# Altium PCB SWITCH_PCB.PcbDoc
Units mm, origin at the board's own origin, x right, y up, seen from the top; angles counter-clockwise.
Board outline 30 x 17 mm, 2 copper layers (Top Layer, Bottom Layer), stack 1.071 mm thick; 37 components, 26 nets, 78 pads, 46 vias.
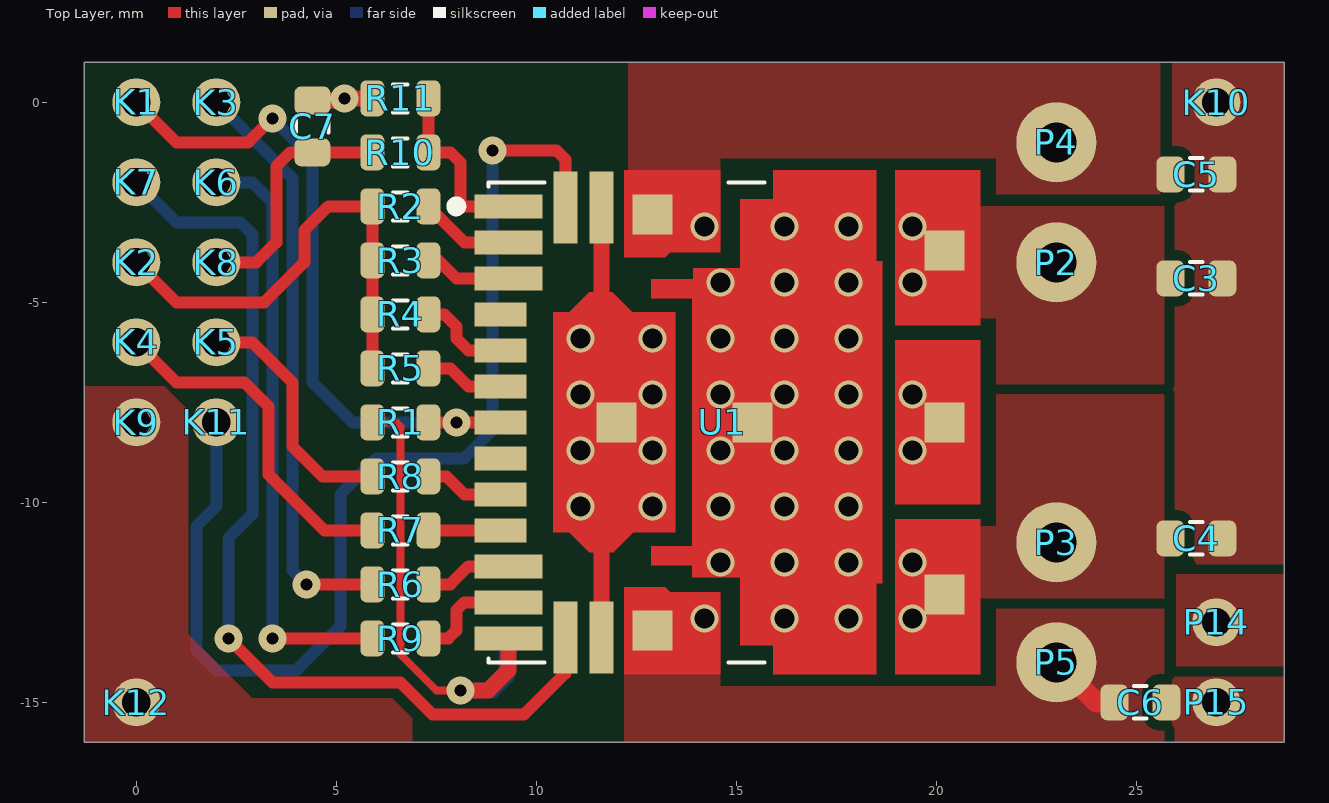
[diagram p0: Top Layer view]
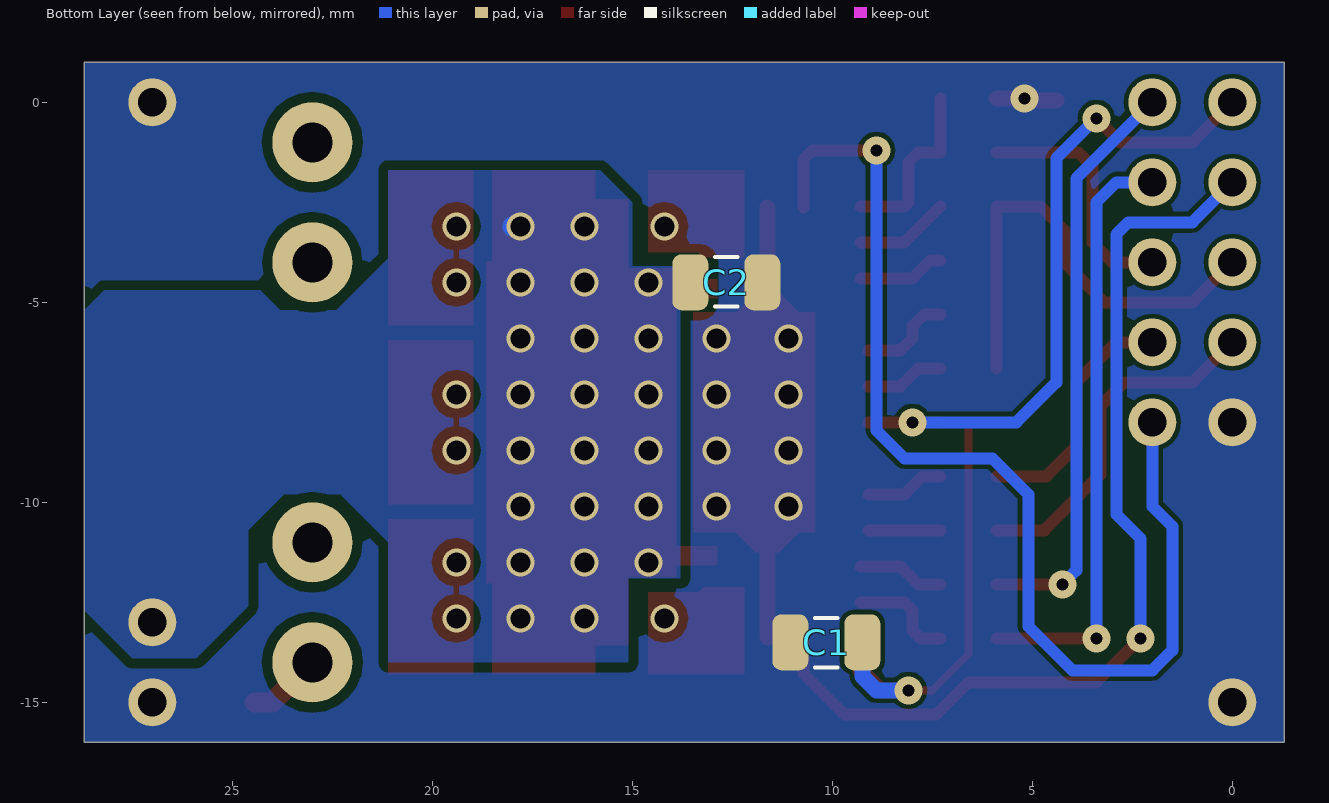
[diagram p1: Bottom Layer view, seen from below]
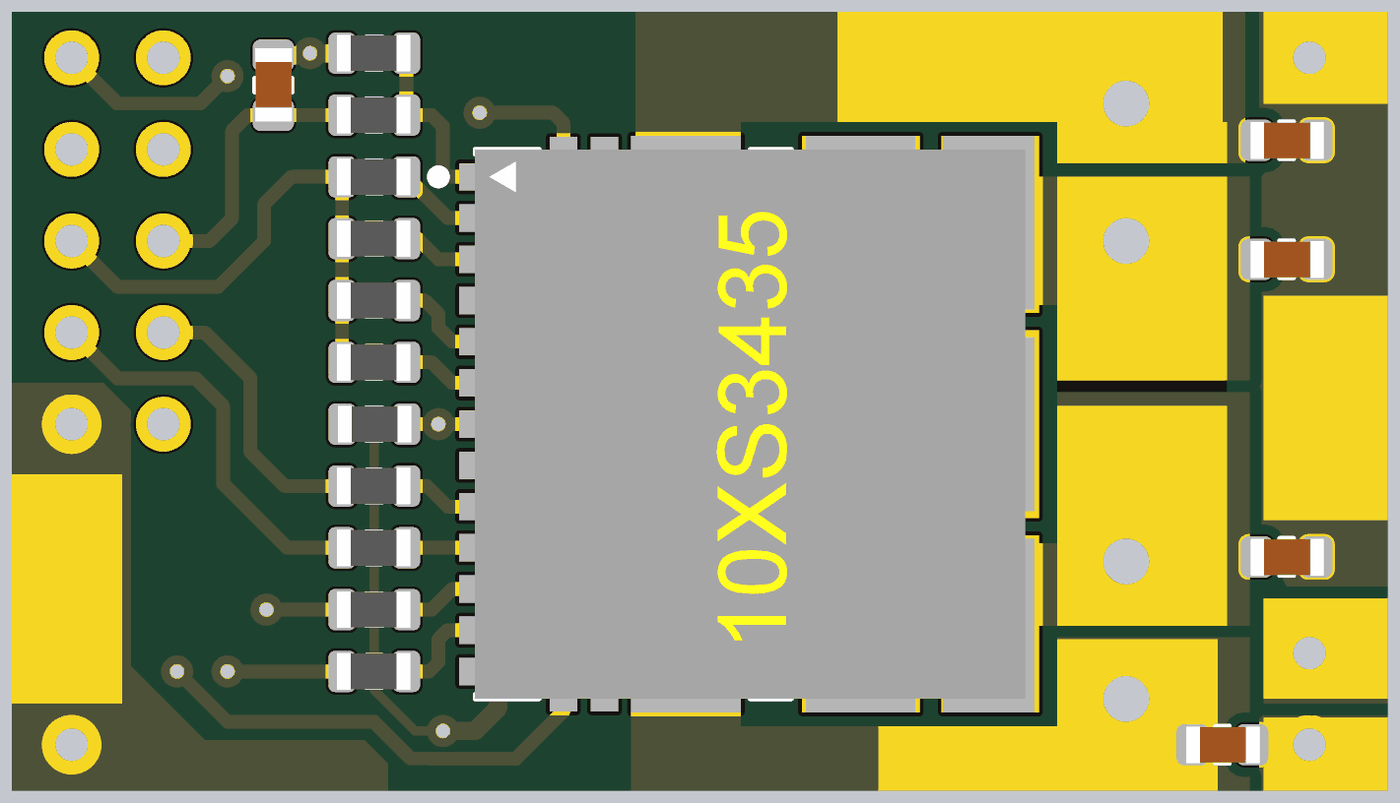
[diagram p2: 3D render of the assembled board from above, using the file's embedded part models]

## Layer stack, top to bottom
Top Solder: solder mask 0.0102, Solder Resist, Dk 3.5
Top Layer: signal copper 0.0356
Dielectric 1: dielectric 1, FR-4, Dk 4.8
Bottom Layer: signal copper 0.0356
Bottom Solder: solder mask 0.0102, Solder Resist, Dk 3.5

## Board outline
-1.3,-16 28.7,-16 28.7,1 -1.3,1

## Design rules (kind name [scope] priority, off if disabled: settings)
Clearance NET24V [All vs InNetClass('24V')] p1: gap=0.25
Clearance Poly [(InNamedPolygon('BOT_GND') OR InNamedPolygon('TOP_GND'))] p2: gap=0.2
Clearance [All] p3: gap=0.11
ComponentClearance [All] p1: gap=0.254 collisioncheckmode=3 verticalgap=0 showdistances=FALSE
HoleSize [All] p1: absolutevalues=TRUE maxlimit=3 minlimit=0.15 maxpercent=80.000 minpercent=20.000
HoleToHoleClearance [All] p1: gap=0.1 allowstackedmicrovias=TRUE
MinimumSolderMaskSliver [All] p1: minsoldermaskwidth=0
PolygonConnect [All] p1: connectstyle=Direct reliefconductorwidth=0.254 reliefentries=4 polygonreliefangle="90 Angle" airgapwidth=0.254
RoutingVias [All] p1: holewidth=0.15 width=0.4 viastyle="Through Hole" minholewidth=0.2 minwidth=0.5 maxholewidth=3 maxwidth=5
SilkToSilkClearance [All] p1: silktosilkclearance=0
SilkToSolderMaskClearance [IsPad] p1: minsilkscreentomaskgap=0 clearancetoexposedcopper=TRUE
SolderMaskExpansion [All] p1: expansion=0.05
Width [All] p1: maxlimit=5 minlimit=0.2 preferedwidth=0.2
23 further rules are at their usual default settings.

## Classes and differential pairs
net class 24V: HS0 HS1 HS2 HS3 VPWR

## Components (designator, comment, footprint, x,y, rotation, side; value= is the part's Value field where it differs from the comment)
C1 "C0805C224K5RACTU" 2012[0805] 10.1,-13.5 r180 bottom
C2 "C0805C224K5RACTU" 2012[0805] 12.7,-4.5 r0 bottom
C3 "CL10B223KB8NNNC" 1608[0603] 26.5,-4.4 r0 top
C4 "CL10B223KB8NNNC" 1608[0603] 26.5,-10.9 r0 top
C5 "CL10B223KB8NNNC" 1608[0603] 26.5,-1.8 r0 top
C6 "CL10B223KB8NNNC" 1608[0603] 25.1,-15 r0 top
C7 "CL10B223KB8NNNC" 1608[0603] 4.4,-0.6 r90 top
K1 "Pin 0.7 mm" "Mount hole 0.7 mm"#1 0,0 r0 top net-tie
K2 "Pin 0.7 mm" "Mount hole 0.7 mm"#1 0,-4 r0 top net-tie
K3 "Pin 0.7 mm" "Mount hole 0.7 mm"#1 2,0 r0 top net-tie
K4 "Pin 0.7 mm" "Mount hole 0.7 mm"#1 0,-6 r0 top net-tie
K5 "Pin 0.7 mm" "Mount hole 0.7 mm"#1 2,-6 r0 top net-tie
K6 "Pin 0.7 mm" "Mount hole 0.7 mm"#1 2,-2 r0 top net-tie
K7 "Pin 0.7 mm" "Mount hole 0.7 mm"#1 0,-2 r0 top net-tie
K8 "Pin 0.7 mm" "Mount hole 0.7 mm"#1 2,-4 r0 top net-tie
K9 "Pin 0.7 mm" "Mount hole 0.7 mm"#1 0,-8 r0 top net-tie
K10 "Pin 0.7 mm" "Mount hole 0.7 mm"#1 27,0 r180 top net-tie
K11 "Pin 0.7 mm" "Mount hole 0.7 mm"#1 2,-8 r0 top net-tie
K12 "Pin 0.7 mm" "Mount hole 0.7 mm"#1 0,-15 r0 top net-tie (schematic designator K9)
P2 "Pin 0.7 mm" "Mount hole 0.7 mm"#2 23,-4 r0 top net-tie
P3 "Pin 0.7 mm" "Mount hole 0.7 mm"#2 23,-11 r0 top net-tie
P4 "Pin 0.7 mm" "Mount hole 0.7 mm"#2 23,-1 r0 top net-tie
P5 "Pin 0.7 mm" "Mount hole 0.7 mm"#2 23,-14 r0 top net-tie
P14 "Pin 0.7 mm" "Mount hole 0.7 mm"#1 27,-13 r180 top net-tie
P15 "Pin 0.7 mm" "Mount hole 0.7 mm"#1 27,-15 r180 top net-tie
R1 "ERJ-3EKF1002V" 0603 6.6,-8 r0 top
R2 "ERJ-3EKF1002V" 0603 6.6,-2.6 r180 top
R3 "ERJ-3EKF1002V" 0603 6.6,-3.95 r180 top
R4 "ERJ-3EKF1002V" 0603 6.6,-5.3 r180 top
R5 "ERJ-3EKF1002V" 0603 6.6,-6.65 r180 top
R6 "ERJ-3EKF1002V" 0603 6.6,-12.05 r180 top
R7 "ERJ-3EKF1002V" 0603 6.6,-10.7 r180 top
R8 "ERJ-3EKF1002V" 0603 6.6,-9.35 r180 top
R9 "ERJ-3EKF1002V" 0603 6.6,-13.4 r180 top
R10 "ERJ-3EKF1002V" 0603 6.6,-1.25 r180 top
R11 "RC0603FR-072K2L" 0603 6.6,0.1 r180 top
U1 "MC10XS3435" "24-PIN PQFN (12*12)" 9.3,-2.6 r90 top

## Footprints (in the part's own frame and the unit in brackets; to place one, negate y for a bottom-side part, rotate by r counter-clockwise, add the part's x,y. Pads: shape width x height; smd on the part's side, far side on the other; paste and mask are expansions set on the pad)
"24-PIN PQFN (12*12)" [mm]
  rect 0.6x1.7 smd mask+0.08: 1(0,0) 2(-0.9,0) 3(-1.8,0) 11(-9,0) 12(-9.9,0) 13(-10.8,0)
  rect 0.6x1.3 smd mask+0.08: 4(-2.7,0.2) 5(-3.6,0.2) 6(-4.5,0.2) 7(-5.4,0.2) 8(-6.3,0.2) 9(-7.2,0.2) 10(-8.1,0.2)
  rect 1x1 smd: 14(-5.4,-2.7) 15(-5.4,-6.1) 18(-10.6,-3.6) 19(-9.7,-10.9) 20(-5.4,-10.9) 21(-1.1,-10.9) 22(-0.2,-3.6)
  rect 1.8x0.6 smd mask+0.08: 16(-10.775,-1.425) 17(-10.775,-2.325) 23(-0.025,-2.325) 24(-0.025,-1.425)
  Top Layer region: -11.7,-6.625 -10.975,-6.625 -10.975,-5.8 -9.275,-5.8 -9.275,-4.6 -8.975,-4.6 -8.975,-3.575 -8.5,-3.575 -8.5,-4.6 -2.3,-4.6 -2.3,-3.575 -1.825,-3.575 -1.825,-4.625 -1.55,-4.625 -1.55,-5.8 0.175,-5.8 0.175,-6.625 0.9,-6.625 0.9,-9.2 -1.375,-9.2 -1.375,-9.35 -9.425,-9.35 -9.425,-9.2 -11.7,-9.2
  Top Layer region: -9.525,-2.9 -9.525,-3.925 -9.65,-4.05 -9.65,-5.3 -11.7,-5.3 -11.7,-2.9
  Top Layer region: -8.15,-1.125 -2.65,-1.125 -2.65,-1.525 -2.15,-2.025 -2.15,-2.6 -2.65,-3.1 -2.65,-4.175 -8.15,-4.175 -8.15,-3.125 -8.65,-2.625 -8.65,-2.025 -8.15,-1.525
  Top Layer region: -1.275,-2.9 -1.275,-3.925 -1.15,-4.05 -1.15,-5.3 0.9,-5.3 0.9,-2.9
  Top Layer region: -11.7,-9.675 -11.7,-11.8 -7.825,-11.8 -7.825,-9.675
  Top Layer region: -2.975,-9.675 -2.975,-11.8 0.9,-11.8 0.9,-9.675
  Top Layer region: -7.45,-9.675 -7.45,-11.8 -3.35,-11.8 -3.35,-9.675
  silkscreen extent -11.4,-6.4 0.6,1.42, body extent -11.4,-11.5 0.6,0.5, height 2.25
0603 [mm] "Chip Resistor; Body 1.6 x 0.8 mm (LxW typ)"
  rrect50% 0.6x0.9 smd mask+0.06: 1(-0.7,0) 2(0.7,0)
  silkscreen extent -0.18,-0.35 0.18,0.35, body extent -0.79,-0.4 0.81,0.4, height 0.45
1608[0603] [mm] "Chip Capacitor; Body 1.6 x 0.8 mm (LxW typ)"
  rrect50% 0.7x0.9 smd mask+0.05: 1(-0.65,0) 2(0.65,0)
  silkscreen extent -0.15,-0.41 0.15,0.41, body extent -0.79,-0.41 0.81,0.39, height 0.8
2012[0805] [mm] "Chip Capacitor; Body 2.0 x 1.2 mm (LxW typ)"
  rrect50% 0.9x1.4 smd mask+0.07: 1(-0.95,0) 2(0.85,0)
  silkscreen extent -0.33,-0.64 0.23,0.61, body extent -1.05,-0.64 0.95,0.61, height 1.25
"Mount hole 0.7 mm"#1 [mm]
  round 1.2 hole 0.71: 1(0,0)
"Mount hole 0.7 mm"#2 [mm]
  round 2 hole 1: 1(0,0)

## Part data
C1 C2: "0.22 uF, 50V, X7R,  0805"
C3 C4 C5 C6 C7: "22 nF, 50V, 10%, X7R, 0603 SMD MLC Capacitor"
R1 R2 R3 R4 R5 R6 R7 R8 R9 R10: library part RL0603K010-1_1, "10 K, 1%, 0603, SMD Resistor, Taped"
R11: library part RL0603K002.2-1_1, "2.2 K, 1%, 0603, SMD Resistor, Taped"
U1: "Quad High-side Switch, -40..+125C, 24 PQFN"

## Via types
v1: diameter 0.7/0.7 (per signal layer), hole 0.5, Top Layer to Bottom Layer, tented both sides, 38 vias
v2: diameter 0.7/0.7 (per signal layer), hole 0.3, Top Layer to Bottom Layer, tented both sides, 8 vias

## Nets (pads, with @x,y where several pads share a name; then routed paths per layer and width w, separated by ;. In a path a pad name is that pad's centre, name@x,y a point inside that pad or via, vN(x,y) a via of type N, cw(c..) or ccw(c..) an arc to the next point about the centre after c; other vN are vias at no path point)
+5V: C1.2 R1.1 U1.13 | length 12.7
  Top Layer w0.2: R1.1 6.5,-8 6.6,-8.1 6.6,-13.8 7.5,-14.7 v2(8.1,-14.7)
  Top Layer w0.4: v2(8.1,-14.7) 8.8,-14.7 9.3,-14.2 U1.13
  Bottom Layer w0.4: v2(8.1,-14.7) 8.9,-14.7 9.25,-14.35 C1.2
FAILS: K1.1 R1.2 U1.7 | length 16.9
  Top Layer w0.3: K1.1 1,-1 2.8,-1 v2(3.4,-0.4) ; R1.2 U1.7
  Bottom Layer w0.3: v2(3.4,-0.4) 4.4,-1.4 4.4,-7 5.4,-8 v2(8,-8)
GND: C1.1 C2.1 C3.2 C4.2 C5.2 C6.2 C7.2 K9.1 K10.1 K12.1 P15.1 R11.2 U1.14 U1.17 U1.23 | length 8.5
  Top Layer w0.4: C7.2 5.15,0.05 v2(5.2,0.1) R11.2 ; v1(11.1,-10.1) 11.625,-10.625 U1.17 ; v1(11.1,-5.9) 11.625,-5.375 U1.23
  other v1: 12.9,-10.1 11.1,-8.7 12.9,-8.7 11.1,-7.3 12.9,-7.3 12.9,-5.9
HS0: C3.1 P2.1 U1.21
  other v1: 19.4,-4.5 19.4,-3.1
HS1: C4.1 P3.1 U1.19 | length 0.8
  Top Layer w0.5: P3.1@22.462,-11 P3.1@23,-10.462
  other v1: 19.4,-12.9 19.4,-11.5
HS2: C5.1 P4.1 U1.22
  other v1: 14.2,-3.1
HS3: C6.1 P5.1 U1.18 | length 1.9
  Top Layer w0.5: P5.1 24,-15 C6.1
  other v1: 14.2,-12.9
MON: C7.1 K8.1 R10.2 | length 6.2
  Top Layer w0.3: K8.1 3,-4 3.5,-3.5 3.5,-1.6 3.85,-1.25 C7.1 R10.2
NetK11_1: K11.1 U1.24 | length 28.1
  Top Layer w0.3: v2(8.9,-1.2) 10.5,-1.2 10.725,-1.425 U1.24
  Bottom Layer w0.3: K11.1 2,-10.1 1.5,-10.6 1.5,-13.7 2,-14.2 4,-14.2 5.1,-13.1 5.1,-9.8 6,-8.9 8.2,-8.9 8.9,-8.2 v2(8.9,-1.2)
NetR2_1: R2.1 U1.2 | length 2.4
  Top Layer w0.3: R2.1 8.2,-3.5 U1.2
NetR3_1: R3.1 U1.3 | length 2.2
  Top Layer w0.3: R3.1 7.55,-3.95 8,-4.4 U1.3
NetR4_1: R4.1 U1.5 | length 2.3
  Top Layer w0.3: R4.1 7.7,-5.3 8,-5.6 8,-5.9 8.3,-6.2 U1.5
NetR5_1: R5.1 U1.6 | length 2
  Top Layer w0.3: R5.1 7.85,-6.65 8.3,-7.1 U1.6
NetR6_1: R6.1 U1.11 | length 2.2
  Top Layer w0.3: R6.1 7.85,-12.05 8.3,-11.6 U1.11
NetR7_1: R7.1 U1.10 | length 1.8
  Top Layer w0.3: R7.1 U1.10
NetR8_1: R8.1 U1.9 | length 2
  Top Layer w0.3: R8.1 7.75,-9.35 8.2,-9.8 U1.9
NetR9_1: R9.1 U1.12 | length 2.7
  Top Layer w0.3: R9.1 7.8,-13.4 8,-13.2 8,-12.7 8.2,-12.5 U1.12
NetR10_1: R10.1 R11.1 U1.1 | length 4.5
  Top Layer w0.3: R11.1 R10.1 7.85,-1.25 8.1,-1.5 8.1,-2.5 8.2,-2.6 U1.1
NewNet1: U1.20
  other v1: 19.4,-8.7 19.4,-7.3
PWM: K2.1 R2.2 R3.2 R4.2 R5.2 | length 11.8
  Top Layer w0.3: K2.1 1,-5 3.2,-5 4.2,-4 4.2,-3.2 4.8,-2.6 R2.2 R3.2 R4.2 R5.2
RST: K5.1 R8.2 | length 6.2
  Top Layer w0.3: K5.1 2.9,-6 3.9,-7 3.9,-8.6 4.65,-9.35 R8.2
SPI_CS: K4.1 R7.2 | length 8.8
  Top Layer w0.3: K4.1 1,-7 2.7,-7 3.3,-7.6 3.3,-9.3 4.7,-10.7 R7.2
SPI_MISO: K7.1 U1.16 | length 24.3
  Top Layer w0.3: v2(2.3,-13.4) 3.4,-14.5 6.6,-14.5 7.4,-15.3 7.837,-15.3 7.847,-15.31 9.69,-15.31 10.725,-14.275 U1.16
  Bottom Layer w0.3: K7.1 1,-3 2.6,-3 2.9,-3.3 2.9,-10.3 2.3,-10.9 v2(2.3,-13.4)
SPI_MOSI: K6.1 R9.2 | length 15
  Top Layer w0.3: v2(3.4,-13.4) R9.2
  Bottom Layer w0.3: K6.1 2.9,-2 3.4,-2.5 v2(3.4,-13.4)
SPI_SCK: K3.1 R6.2 | length 14.6
  Top Layer w0.3: v2(4.25,-12.05) R6.2
  Bottom Layer w0.3: K3.1 3.9,-1.9 3.9,-11.7 v2(4.25,-12.05)
VPWR: C2.2 P14.1 U1.15 | length 0.2
  Bottom Layer w0.5: v1(17.8,-3.1) v1@18,-3.1
  other v1: 16.2,-12.9 17.8,-12.9 14.6,-11.5 16.2,-11.5 17.8,-11.5 14.6,-10.1 16.2,-10.1 17.8,-10.1 14.6,-8.7 16.2,-8.7 17.8,-8.7 14.6,-7.3 16.2,-7.3 17.8,-7.3 14.6,-5.9 16.2,-5.9 17.8,-5.9 14.6,-4.5 16.2,-4.5 17.8,-4.5 16.2,-3.1
pads on no net: U1.4 U1.8

## Polygon pours and split planes (outlines as drawn)
HS0 on Top Layer "HS0" (solid, remove dead copper, pour order 21): 19,-2.6 19,-5.4 21.5,-5.4 21.5,-7.3 25.7,-7.3 25.7,-2.6
NewNet1 on Top Layer (solid, remove dead copper, pour order 29): 19,-6.9 20.7,-6.9 20.7,-9.2 19,-9.2
HS2 on Top Layer "HS2" (solid, remove dead copper, pour order 19): 12.3,1 12.3,-3.5 14.6,-3.5 14.6,-1.4 21.5,-1.4 21.5,-2.3 25.6,-2.3 25.6,1
HS1 on Top Layer "HS1" (solid, pour order 20): 25.7,-12.4 25.7,-7.3 21.5,-7.3 21.5,-10.6 19.1,-10.6 19.1,-12.4
HS3 on Top Layer "HS3" (solid, remove dead copper, pour order 22): 21.5,-12.6 21.5,-14.6 14.6,-14.6 14.6,-12.4 12.2,-12.4 12.2,-16 25.7,-16 25.7,-12.6
VPWR on Top Layer "VPWR_TOP" (solid, remove dead copper, pour order 18): 26,-11.8 28.7,-11.8 28.7,-14.1 26,-14.1
GND on Top Layer "GND_TOP" (solid, remove dead copper, pour order 26): -1.3,-7.1 0.7,-7.1 1.3,-7.7 1.3,-13.3 2.9,-14.9 6.4,-14.9 6.9,-15.4 6.9,-16 -1.3,-16
GND on Top Layer "GND_TOP" (solid, remove dead copper, pour order 23): 25.9,1 25.9,-9.6 25.9,-16 28.7,-16 28.7,1
GND on Bottom Layer "GND_BOT" (solid, remove dead copper, pour order 25): -1.3,-16 -1.3,1 28.7,1 28.7,-16
VPWR on Bottom Layer "VPWR_BOT" (solid, remove dead copper, pour order 24): 13.8,-4.1 13.8,-11.9 15.1,-11.9 15.1,-14 21.1,-14 21.1,-11 22.3,-9.8 23.7,-9.8 24.6,-10.7 24.6,-12.6 25.9,-13.9 27.5,-13.9 28.7,-12.7 28.7,-5.2 28.2,-4.7 24.3,-4.7 23.8,-5.2 22.4,-5.2 21.1,-3.9 21.1,-1.7 15.8,-1.7 15,-2.5 15,-4.1

## Silkscreen, mask and mechanical layers (free items; w line width, h text height)
Top Solder:
  rectangle: 26,-14 28.7,-11.8
  rectangle: 26,-1 28.7,1
  rectangle: 26,-16 28.7,-14.4
  rectangle: 26,-10.1 28.7,-5.2
  rectangle: 17.6,-16 21.5,-14.6
  rectangle: 21.5,-16 25,-12.7
  rectangle: 21.5,-12.4 25.2,-7.6
  rectangle: 21.5,-7.3 25.2,-2.6
  rectangle: 21.5,-2.3 25.2,-1.4
  rectangle: 16.7,-1.4 25.1,1
  rectangle: -1.3,-14.1 1.1,-9.1
Bottom Solder:
  rectangle: 20.7,-9.3 28.7,-5.7
Mechanical 1:
  the board outline again, w0.11